# Altium PCB DOOR_PCB_MAIN.PcbDoc
Units mm, origin at the board's own origin, x right, y up, seen from the top; angles counter-clockwise.
Board outline 152.4 x 101.6 mm, 2 copper layers (Top Layer, Bottom Layer); 29 components, 46 nets, 129 pads, 1 vias.
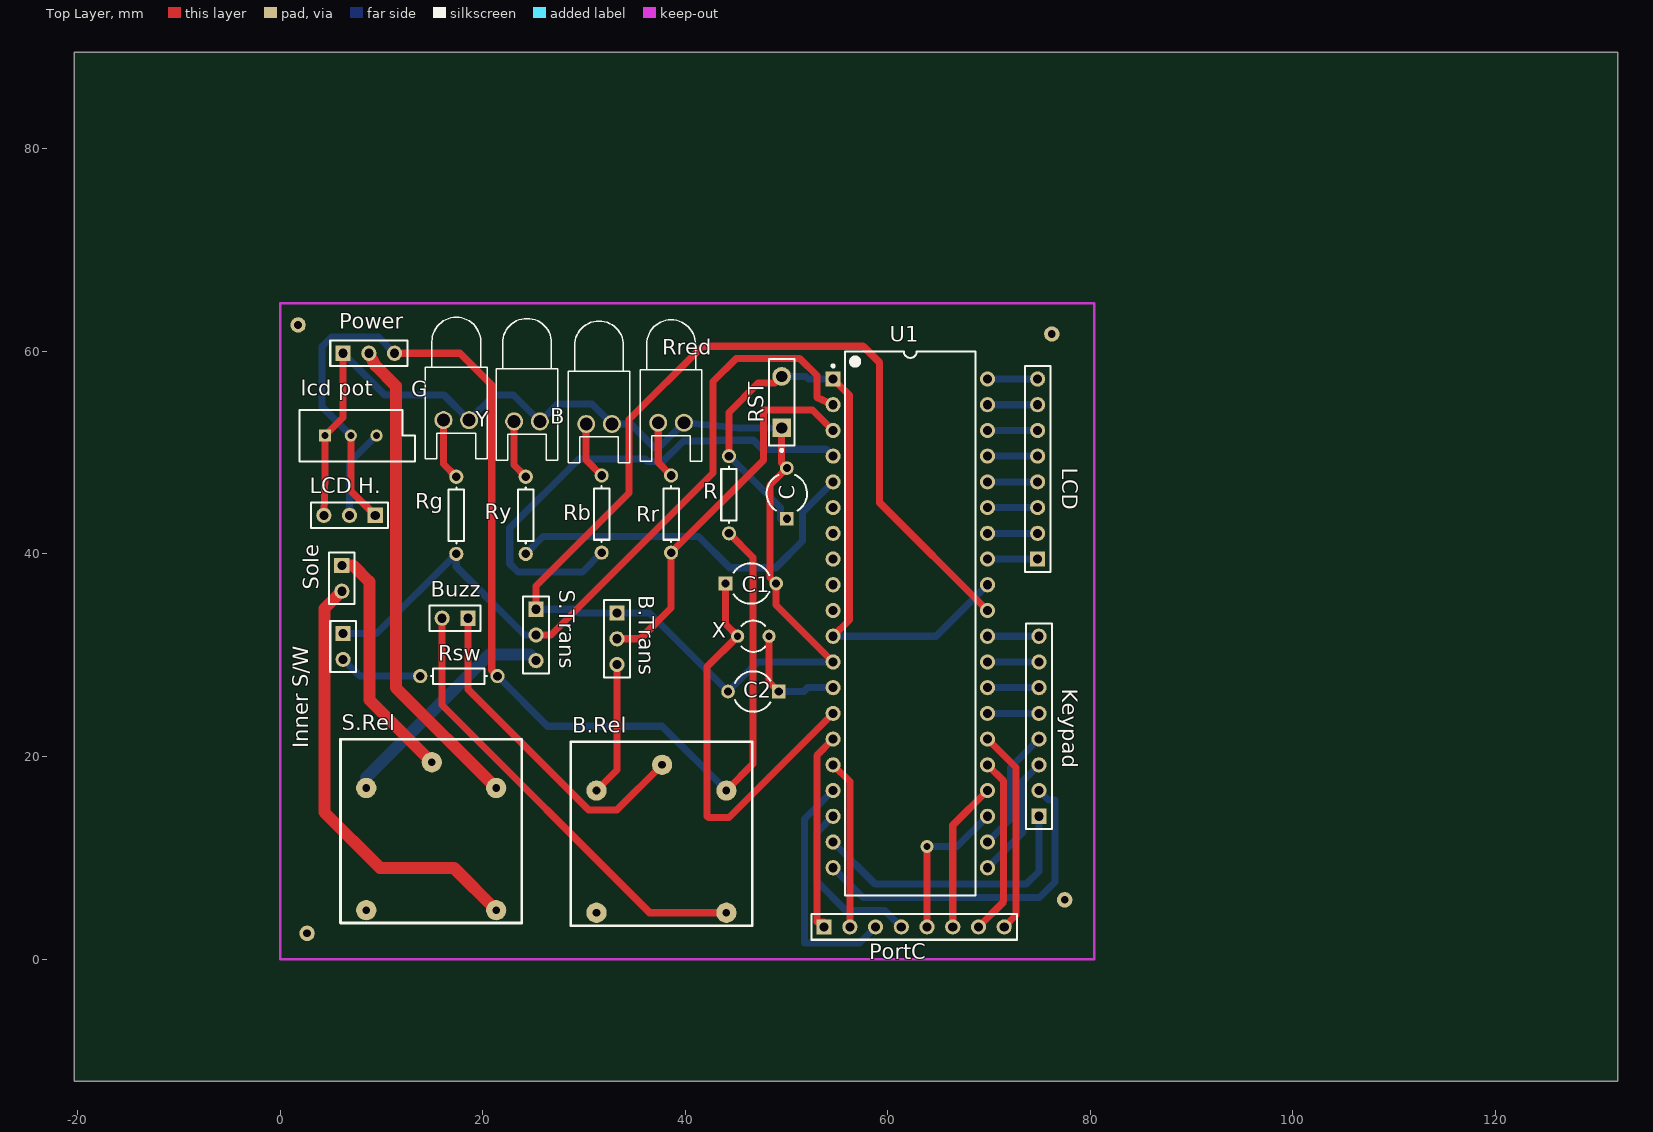
[diagram p0: Top Layer view]
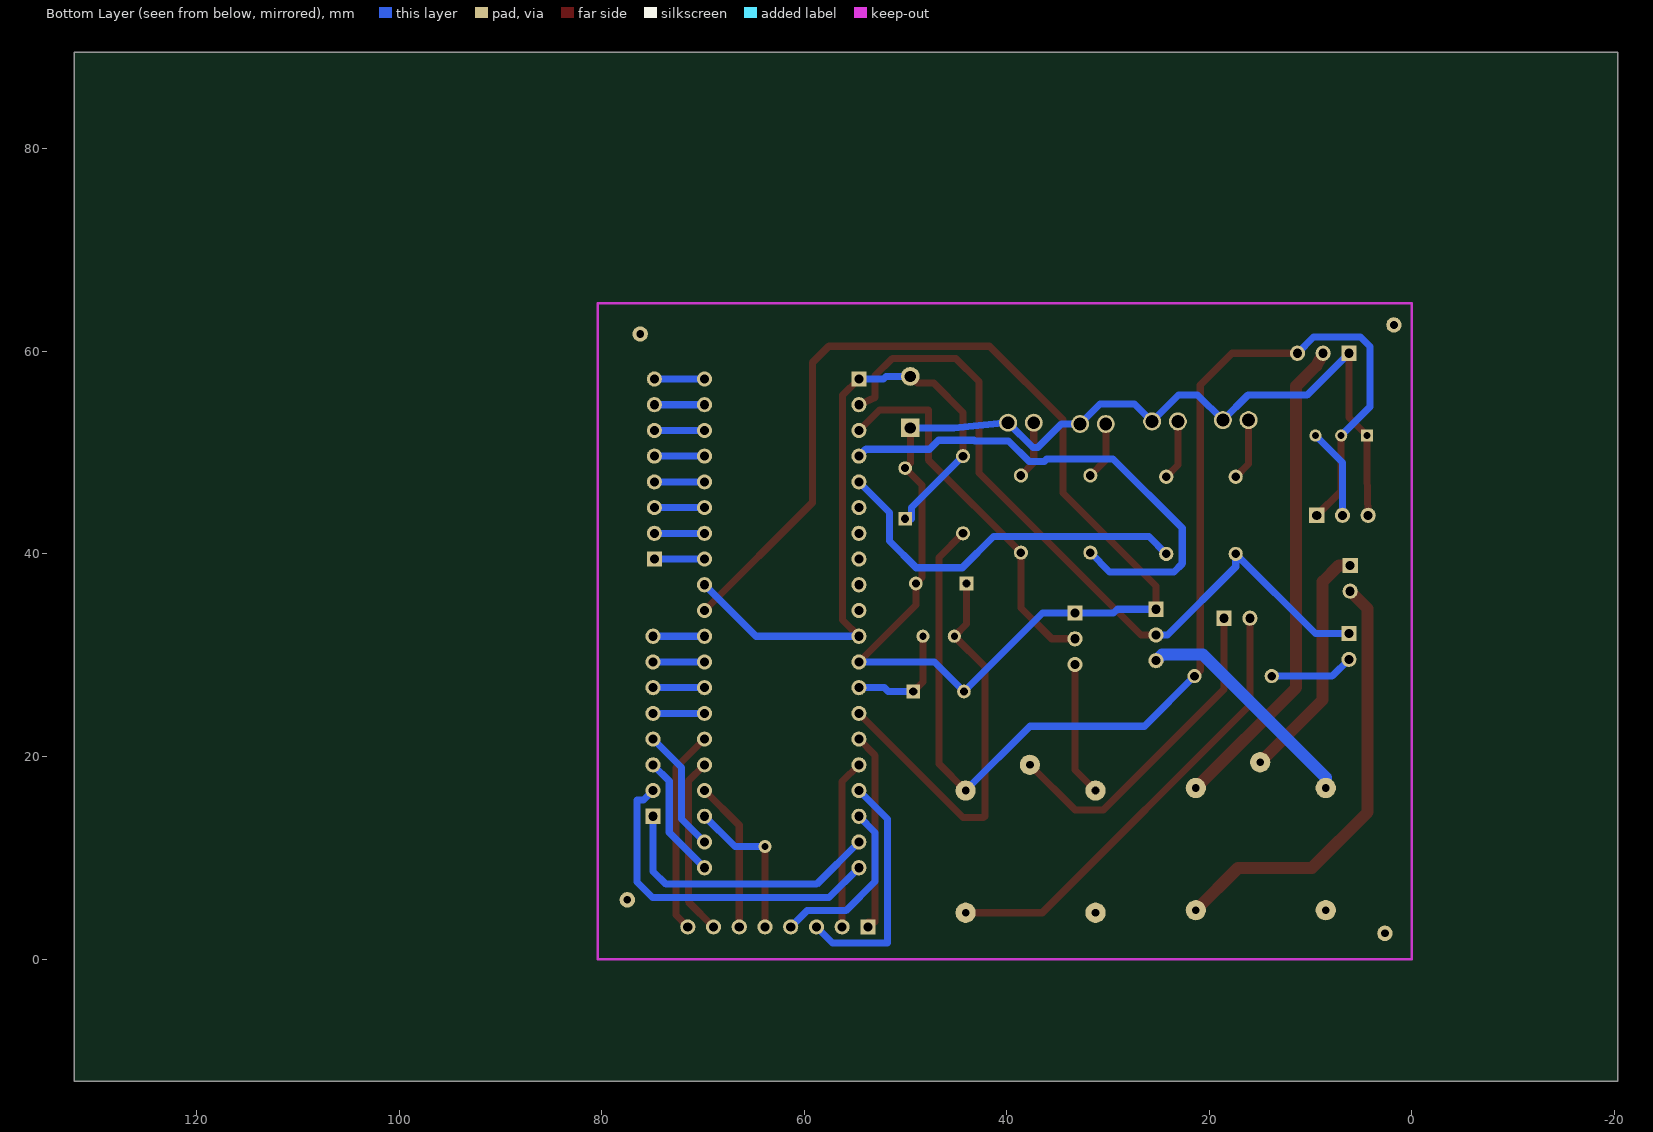
[diagram p1: Bottom Layer view, seen from below]

## Layer stack, top to bottom
Top Layer: signal copper 0.0356
Dielectric: dielectric 0.32, FR-4, Dk 4.8
Bottom Layer: signal copper 0.0356

## Board outline
-20.32,-12.065 132.08,-12.065 132.08,89.535 -20.32,89.535

## Design rules (kind name [scope] priority, off if disabled: settings)
Clearance [All] p1: gap=0.5
PolygonConnect [All] p1: connectstyle=Relief reliefconductorwidth=0.254 reliefentries=4 polygonreliefangle="90 Angle"
RoutingTopology [All] p1: topology=Daisy_Simple
RoutingVias [All] p1: holewidth=0.711 width=1.27 viastyle="Through Hole" minholewidth=0.711 minwidth=1.27 maxholewidth=0.711 maxwidth=1.27
SilkscreenOverComponentPads [All] p1: minsilkscreentomaskgap=0.254
SolderMaskExpansion [All] p1: expansion=0.102
Width Sole [(InNet('NetS.Rel_4') OR InNet('NetS.Rel_5') OR InNet('NetPower_2') OR InNet('NetS.Rel_1'))] p1: maxlimit=1.2 minlimit=1.2 preferedwidth=1.2
Width [All] p2: maxlimit=0.7 minlimit=0.7 preferedwidth=0.7
26 further rules are at their usual default settings.

## Components (designator, comment, footprint, x,y, rotation, side; value= is the part's Value field where it differs from the comment)
B "Blue" LED-0 31.496,52.832 r180 top
B.Rel "Header 5" relay 37.846,10.922 r0 top
B.Trans "2N3904" HDR1X3 33.274,34.163 r270 top
Buzz "Header 2" HDR1X2 18.542,33.655 r180 top
C "Cap2" CAPR5-4X5 50.038,45.974 r90 top
C1 "Cap2" CAPR5-4X5 46.482,37.084 r0 top
C2 "Cap2" CAPR5-4X5 46.736,26.416 r180 top
G "Green" LED-0 17.399,53.213 r180 top
"Inner S/W" "Header 2" HDR1X2 6.223,32.131 r270 top
Keypad "Header 8" HDR1X8 74.93,14.097 r90 top
LCD "Header 8" HDR1X8 74.803,39.497 r90 top
"LCD H." "Header 3H" HDR1X3 9.398,43.815 r180 top
"lcd pot" "RPot" VR5 6.985,51.689 r0 top
PortC "Header 8" HDR1X8 53.721,3.175 r0 top
Power "Header 3" HDR1X3 6.223,59.817 r0 top
R "Res1" AXIAL-0.3 44.323,45.847 r270 top
Rb "Res1" AXIAL-0.3 31.75,43.942 r270 top
Rg "Res1" AXIAL-0.3 17.399,43.815 r270 top
Rr "Res1" AXIAL-0.3 38.608,43.942 r270 top
Rred "Red" LED-0 38.608,52.959 r180 top
RST "SW-PB" SPST-2 49.53,54.991 r90 top
Rsw "Res1" AXIAL-0.3 17.653,27.94 r0 top
Ry "Res1" AXIAL-0.3 24.257,43.815 r270 top
S.Rel "Header 5" relay 15.113,11.176 r0 top
S.Trans "2N3904" HDR1X3 25.273,34.544 r270 top
Sole "Header 2" HDR1X2 6.096,38.862 r270 top
U1 "PIC18F4520-I/P" PDIP600-P40 62.23,33.147 r0 top
X "XTAL" R38 46.736,31.877 r270 top
Y "Yellow" LED-0 24.384,53.086 r180 top

## Footprints (in the part's own frame and the unit in brackets; to place one, negate y for a bottom-side part, rotate by r counter-clockwise, add the part's x,y. Pads: shape width x height; smd on the part's side, far side on the other; paste and mask are expansions set on the pad)
AXIAL-0.3 [mm] "Axial Device, Thru-Hole; 2 Leads; 0.3 in Pin Spacing"
  round 1.4 hole 0.85: 1(-3.81,0) 2(3.81,0)
  silkscreen extent -2.77,-0.76 2.77,0.76
CAPR5-4X5 [mm] "Capacitor; 2 Leads"
  rect 1.35x1.35 hole 0.8: 1(-2.5,0)
  round 1.35 hole 0.8: 2(2.5,0)
  silkscreen extent -1.69,-2 1.82,2
HDR1X2 [mm] "Connector; Header; 2 Position"
  rect 1.5x1.5 hole 0.9: 1(0,0)
  round 1.5 hole 0.9: 2(2.54,0)
  silkscreen extent -1.27,-1.27 3.81,1.27
HDR1X3 [mm] "Connector; Header; 3 Position"
  rect 1.5x1.5 hole 0.9: 1(0,0)
  round 1.5 hole 0.9: 2(2.54,0) 3(5.08,0)
  silkscreen extent -1.27,-1.27 6.35,1.27
HDR1X8 [mm] "Connector; Header; 8 Position"
  rect 1.5x1.5 hole 0.9: 1(0,0)
  round 1.5 hole 0.9: 2(2.54,0) 3(5.08,0) 4(7.62,0) 5(10.16,0) 6(12.7,0) 7(15.24,0) 8(17.78,0)
  silkscreen extent -1.27,-1.27 19.05,1.27
LED-0 [mil] "LED; 2 Leads"
  round 70 hole 50: 1(50,0) 2(-50,0)
  silkscreen extent -120,-400 120,150
PDIP600-P40 [mm] "DIP, 40-Leads, Row Spacing 15.24mm, Pitch 2.54mm, Body 51.8x13.5mm"
  rect 1.5x1.5 hole 0.9: 1(-7.62,24.13)
  round 1.5 hole 0.9: 2(-7.62,21.59) 3(-7.62,19.05) 4(-7.62,16.51) 5(-7.62,13.97) 6(-7.62,11.43) 7(-7.62,8.89) 8(-7.62,6.35) 9(-7.62,3.81) 10(-7.62,1.27) 11(-7.62,-1.27) 12(-7.62,-3.81) 13(-7.62,-6.35) 14(-7.62,-8.89) 15(-7.62,-11.43) 16(-7.62,-13.97) 17(-7.62,-16.51) 18(-7.62,-19.05) 19(-7.62,-21.59) 20(-7.62,-24.13) 21(7.62,-24.13) 22(7.62,-21.59) 23(7.62,-19.05) 24(7.62,-16.51) 25(7.62,-13.97) 26(7.62,-11.43) 27(7.62,-8.89) 28(7.62,-6.35) 29(7.62,-3.81) 30(7.62,-1.27) 31(7.62,1.27) 32(7.62,3.81) 33(7.62,6.35) 34(7.62,8.89) 35(7.62,11.43) 36(7.62,13.97) 37(7.62,16.51) 38(7.62,19.05) 39(7.62,21.59) 40(7.62,24.13)
  silkscreen extent -7.74,-26.85 6.45,26.85, body extent -7.3,-26.85 7.3,26.85, height 6.35
R38 [mm] "Crystal, Thru-Hole; 2 Leads; Body 3.1 x 8.2 mm (Dia.xH)"
  round 1.3 hole 0.7: 1(0,1.55) 2(0,-1.55)
  silkscreen extent -1.55,-1.19 1.55,1.17
relay [mm]
  round 2 hole 0.762: 1(-6.604,5.715) 2(6.223,5.715) 3(-6.604,-6.35) 4(6.223,-6.35) 5(-0.127,8.255)
  silkscreen extent -9.14,-7.62 8.76,10.54
SPST-2 [mm] "Switch; 2 Leads"
  rect 1.85x1.85 hole 1.1: 1(-2.54,0)
  round 1.85 hole 1.1: 2(2.54,0)
  silkscreen extent -4.89,-1.27 4.28,1.27
VR5 [mm] "Thru-Hole; 3 Leads"
  rect 1.2x1.2 hole 0.7: 1(-2.54,0)
  round 1.2 hole 0.7: 2(0,0) 3(2.54,0)
  silkscreen extent -5.08,-2.54 6.35,2.54

## Part data
B: library part LED3, "Typical BLUE SiC LED"
B.Rel S.Rel: "Header, 5-Pin"
B.Trans S.Trans: "NPN General Purpose Amplifier"
Buzz "Inner S/W" Sole: "Header, 2-Pin"
C C1 C2: "Capacitor"
G Rred Y: library part LED2, "Typical RED, GREEN, YELLOW, AMBER GaAs LED"
Keypad LCD PortC: "Header, 8-Pin"
"LCD H.": "Header, 3-Pin, Right Angle"
"lcd pot": "Potentiometer"
Power: "Header, 3-Pin"
R Rb Rg Rr Rsw Ry: "Resistor"
RST: "Switch"
U1: "Enhanced Flash Microcontroller with 10-Bit A/D and nanoWatt Technology, 32K Flash, 40-Pin PDIP, Industrial Temperature Range"
X: "Crystal Oscillator"

## Free pads (board coordinates)
  round 1.524 hole 0.762: 0(76.2,61.722) 1(77.47,5.842) 2(2.667,2.54) 3(1.778,62.611)

## Via types
v1: diameter 1.27, hole 0.711, Top Layer to Bottom Layer, 1 vias

## Nets (pads, with @x,y where several pads share a name; then routed paths per layer and width w, separated by ;. In a path a pad name is that pad's centre, name@x,y a point inside that pad or via, vN(x,y) a via of type N, cw(c..) or ccw(c..) an arc to the next point about the centre after c; other vN are vias at no path point)
GND: "LCD H..3" "lcd pot.1" B.2 B.Trans.1 C1.2 C2.2 C.2 G.2 Power.1 Rred.2 RST.1 S.Trans.1 U1.12 U1.31 Y.2 | length 208.8
  Top Layer w0.7: 4.318,43.815 4.445,47.879 4.445,51.689 6.223,53.467 Power.1 ; S.Trans.1 25.273,36.83 34.468,46.025 34.468,53.264 41.71,60.506 57.579,60.506 59.207,58.877 59.207,45.06 U1.31 ; RST.1 49.53,48.982 C.2 48.387,46.823 48.387,37.679 C1.2 48.982,34.965 U1.12
  Bottom Layer w0.7: Power.1 10.363,55.677 16.205,55.677 G.2 21.158,55.702 23.038,55.702 Y.2 27.381,54.813 30.785,54.813 B.2 34.62,52.832 36.95,50.502 37.421,50.502 Rred.2 45.212,52.451 RST.1 ; S.Trans.1 29.083,34.544 29.464,34.163 B.Trans.1 36.489,34.163 C2.2 47.157,29.337 U1.12
NetB.Rel_1: B.Rel.1 B.Trans.3 | length 13.3
  Top Layer w0.7: B.Rel.1 33.274,18.669 B.Trans.3
NetB.Rel_2: "LCD H..1" "lcd pot.2" B.Rel.2 Power.3 R.2 Rsw.2 | length 121.7
  Top Layer w0.7: 6.985,51.689 6.985,46.228 9.398,43.815 ; Power.3 17.78,59.817 20.904,56.693 20.904,28.499 Rsw.2 ; B.Rel.2 46.711,19.279 46.711,39.649 R.2
  Bottom Layer w0.7: 6.985,51.689 4.14,54.534 4.14,60.477 5.08,61.417 9.703,61.417 Power.3 ; Rsw.2 26.416,22.987 37.719,22.987 B.Rel.2
NetB.Rel_4: B.Rel.4 Buzz.2 | length 45.1
  Top Layer w0.7: Buzz.2 16.002,25.07 36.5,4.572 B.Rel.4
NetB.Rel_5: B.Rel.5 Buzz.1 | length 33
  Top Layer w0.7: Buzz.1 18.542,26.645 30.48,14.707 33.249,14.707 B.Rel.5
NetB.Trans_2: B.Trans.2 Rr.2 U1.3 | length 37.6
  Top Layer w0.7: B.Trans.2 35.56,31.623 38.608,34.671 Rr.2 47.752,49.276 47.752,54.229 52.578,54.229 U1.3
NetB_1: B.1 Rb.1 | length 5.7
  Top Layer w0.7: B.1 30.226,49.276 Rb.1
NetC1_1: C1.1 U1.14 X.2 | length 41.5
  Top Layer w0.7: C1.1 43.982,33.081 X.2 42.164,28.855 42.164,14.097 42.291,13.97 44.323,13.97 U1.14
NetC2_1: C2.1 U1.13 X.1 | length 11.4
  Top Layer w0.7: X.1 48.286,27.366 C2.1
  Bottom Layer w0.7: C2.1 51.714,26.416 52.095,26.797 U1.13
NetC_1: C.1 R.1 RST.2 U1.1 U1.11 U1.32 | length 69.2
  Top Layer w0.7: R.1 44.323,53.975 47.219,56.871 48.87,56.871 RST.2 ; U1.11 56.21,33.477 56.21,55.677 U1.1
  Bottom Layer w0.7: R.1 49.403,44.577 49.403,43.474 C.1 ; RST.2 51.943,57.531 52.197,57.277 U1.1 ; U1.11 64.77,31.877 U1.32
NetG_1: G.1 Rg.1 | length 6.1
  Top Layer w0.7: G.1 16.129,48.895 Rg.1
"NetInner S/W_1": "Inner S/W.1" Rg.2 S.Trans.2 U1.2 | length 75.3
  Top Layer w0.7: S.Trans.2 26.746,32.004 42.748,48.006 42.748,57.017 45.037,59.306 51.308,59.306 53.01,57.604 53.01,55.448 U1.2
  Bottom Layer w0.7: 6.223,32.131 9.525,32.131 Rg.2 17.399,38.735 24.13,32.004 S.Trans.2
"NetInner S/W_2": "Inner S/W.2" Rsw.1 | length 8.3
  Bottom Layer w0.7: 6.223,29.591 7.874,27.94 Rsw.1
NetKeypad_1: Keypad.1 U1.19 | length 28
  Bottom Layer w0.7: U1.19 58.776,7.391 73.66,7.391 74.93,8.661 Keypad.1
NetKeypad_2: Keypad.2 U1.20 | length 33.8
  Bottom Layer w0.7: U1.20 57.556,6.071 74.981,6.071 76.53,7.62 76.53,15.697 75.87,15.697 Keypad.2
NetKeypad_3: Keypad.3 U1.21 | length 12.3
  Bottom Layer w0.7: U1.21 73.33,12.497 73.33,17.577 Keypad.3
NetKeypad_4: Keypad.4 U1.22 | length 12.3
  Bottom Layer w0.7: U1.22 72.13,13.837 72.13,18.917 Keypad.4
NetKeypad_5: Keypad.5 U1.27 | length 5.1
  Bottom Layer w0.7: U1.27 Keypad.5
NetKeypad_6: Keypad.6 U1.28 | length 5.1
  Bottom Layer w0.7: U1.28 Keypad.6
NetKeypad_7: Keypad.7 U1.29 | length 5.1
  Bottom Layer w0.7: U1.29 Keypad.7
NetKeypad_8: Keypad.8 U1.30 | length 5.1
  Bottom Layer w0.7: U1.30 Keypad.8
"NetLCD H._2": "LCD H..2" "lcd pot.3" | length 9
  Bottom Layer w0.7: 6.858,43.815 6.858,49.022 9.525,51.689
NetLCD_1: LCD.1 U1.33 | length 5
  Bottom Layer w0.7: U1.33 LCD.1
NetLCD_2: LCD.2 U1.34 | length 5
  Bottom Layer w0.7: U1.34 LCD.2
NetLCD_3: LCD.3 U1.35 | length 5
  Bottom Layer w0.7: U1.35 LCD.3
NetLCD_4: LCD.4 U1.36 | length 5
  Bottom Layer w0.7: U1.36 LCD.4
NetLCD_5: LCD.5 U1.37 | length 5
  Bottom Layer w0.7: U1.37 LCD.5
NetLCD_6: LCD.6 U1.38 | length 5
  Bottom Layer w0.7: U1.38 LCD.6
NetLCD_7: LCD.7 U1.39 | length 5
  Bottom Layer w0.7: U1.39 LCD.7
NetLCD_8: LCD.8 U1.40 | length 5
  Bottom Layer w0.7: U1.40 LCD.8
NetPortC_1: PortC.1 U1.15 | length 19.9
  Top Layer w0.7: PortC.1 53.721,3.658 53.01,3.658 53.01,20.117 U1.15
NetPortC_2: PortC.2 U1.16 | length 16.7
  Top Layer w0.7: U1.16 56.261,17.526 PortC.2
NetPortC_3: PortC.3 U1.17 | length 23.9
  Bottom Layer w0.7: U1.17 51.791,13.818 51.791,1.575 57.201,1.575 PortC.3
NetPortC_4: PortC.4 U1.18 | length 17.3
  Bottom Layer w0.7: U1.18 53.01,12.497 53.01,7.645 55.88,4.775 59.741,4.775 PortC.4
NetPortC_5: PortC.5 U1.23 | length 15.1
  Top Layer w0.7: PortC.5 v1(63.881,11.1)
  Bottom Layer w0.7: v1(63.881,11.1) 66.853,11.1 U1.23
NetPortC_6: PortC.6 U1.24 | length 14.9
  Top Layer w0.7: PortC.6 66.421,13.208 U1.24
NetPortC_7: PortC.7 U1.25 | length 17.7
  Top Layer w0.7: PortC.7 71.45,5.664 71.45,17.577 U1.25
NetPortC_8: PortC.8 U1.26 | length 20.2
  Top Layer w0.7: U1.26 72.669,18.898 72.669,4.343 PortC.8
NetPower_2: Power.2 S.Rel.2 | length 48
  Top Layer w1.2: Power.2 9.449,58.572 11.43,56.591 11.43,26.797 S.Rel.2
NetRb_2: Rb.2 U1.4 | length 50.1
  Bottom Layer w0.7: Rb.2 29.845,38.227 23.495,38.227 22.682,39.04 22.682,42.557 29.503,49.378 36.068,49.378 36.297,49.149 37.821,49.149 39.827,51.156 43.18,51.156 43.256,51.232 46.736,51.232 47.625,50.343 53.924,50.343 U1.4
NetRr_1: Rr.1 Rred.1 | length 5.7
  Top Layer w0.7: Rred.1 37.338,49.022 Rr.1
NetRy_1: Ry.1 Y.1 | length 5.9
  Top Layer w0.7: Y.1 23.114,48.768 Ry.1
NetRy_2: Ry.2 U1.5 | length 37.5
  Bottom Layer w0.7: Ry.2 25.959,41.707 41.326,41.707 44.399,38.633 48.946,38.633 51.587,41.275 51.587,44.094 U1.5
NetS.Rel_1: S.Rel.1 S.Trans.3 | length 23.1
  Bottom Layer w1.2: S.Rel.1 8.509,17.932 20.65,30.074 24.663,30.074 S.Trans.3
NetS.Rel_4: S.Rel.4 Sole.2 | length 43.5
  Top Layer w1.2: Sole.2 4.369,34.595 4.369,14.503 9.881,8.992 17.17,8.992 S.Rel.4
NetS.Rel_5: S.Rel.5 Sole.1 | length 23.8
  Top Layer w1.2: Sole.1 7.214,38.862 8.814,37.262 8.814,25.603 S.Rel.5
pads on no net: B.Rel.3 S.Rel.3 U1.6 U1.7 U1.8 U1.9 U1.10

## Keep-outs
Keep-Out Layer:
  lines w0.254: 0,0 0,64.77 80.391,64.77 80.391,0 0,0